# Altium PCB PCB2.PcbDoc
Units mil, origin at the board's own origin, x right, y up, seen from the top; angles counter-clockwise.
Board outline 2510 x 3100 mil, 2 copper layers (Top Layer, Bottom Layer); 20 components, 24 nets, 168 pads, 7 vias.
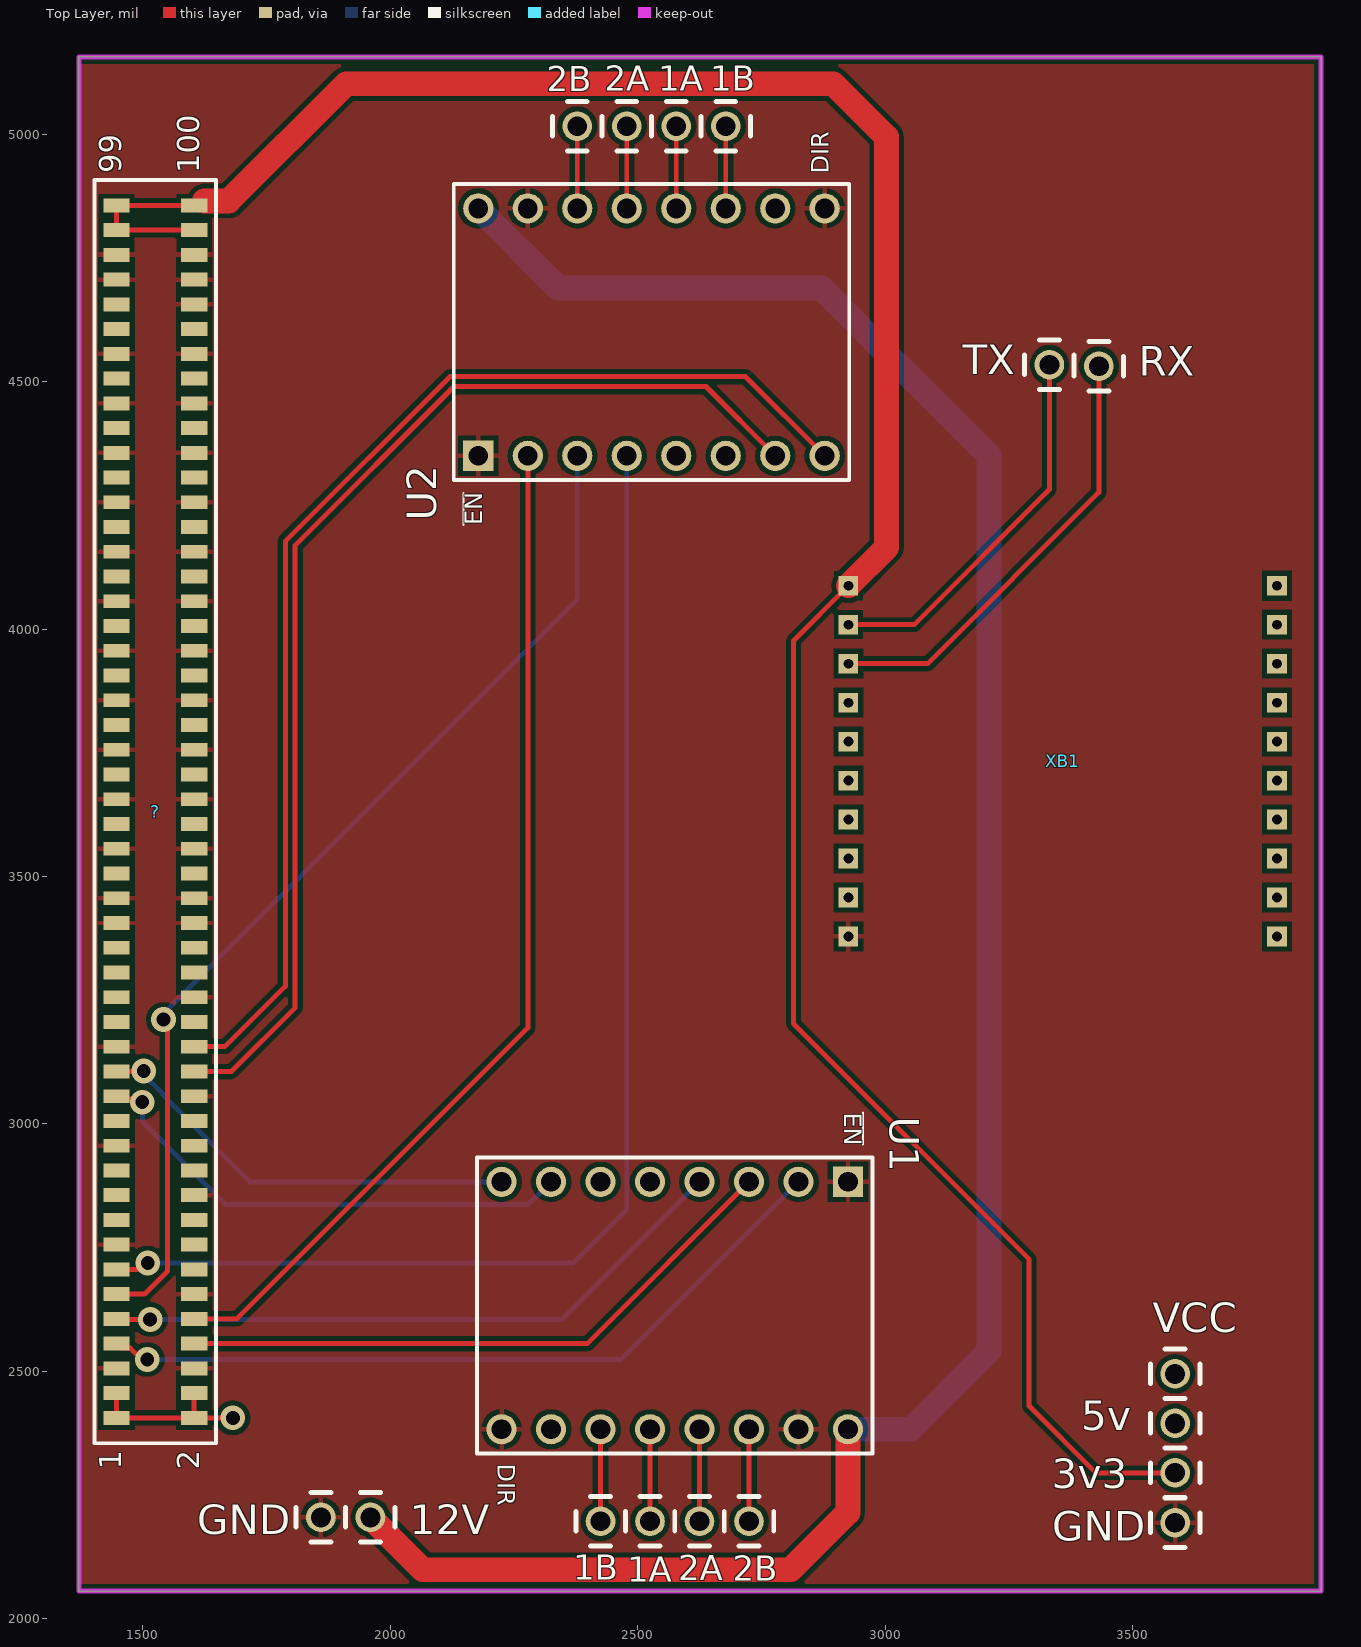
[diagram p0: Top Layer view]
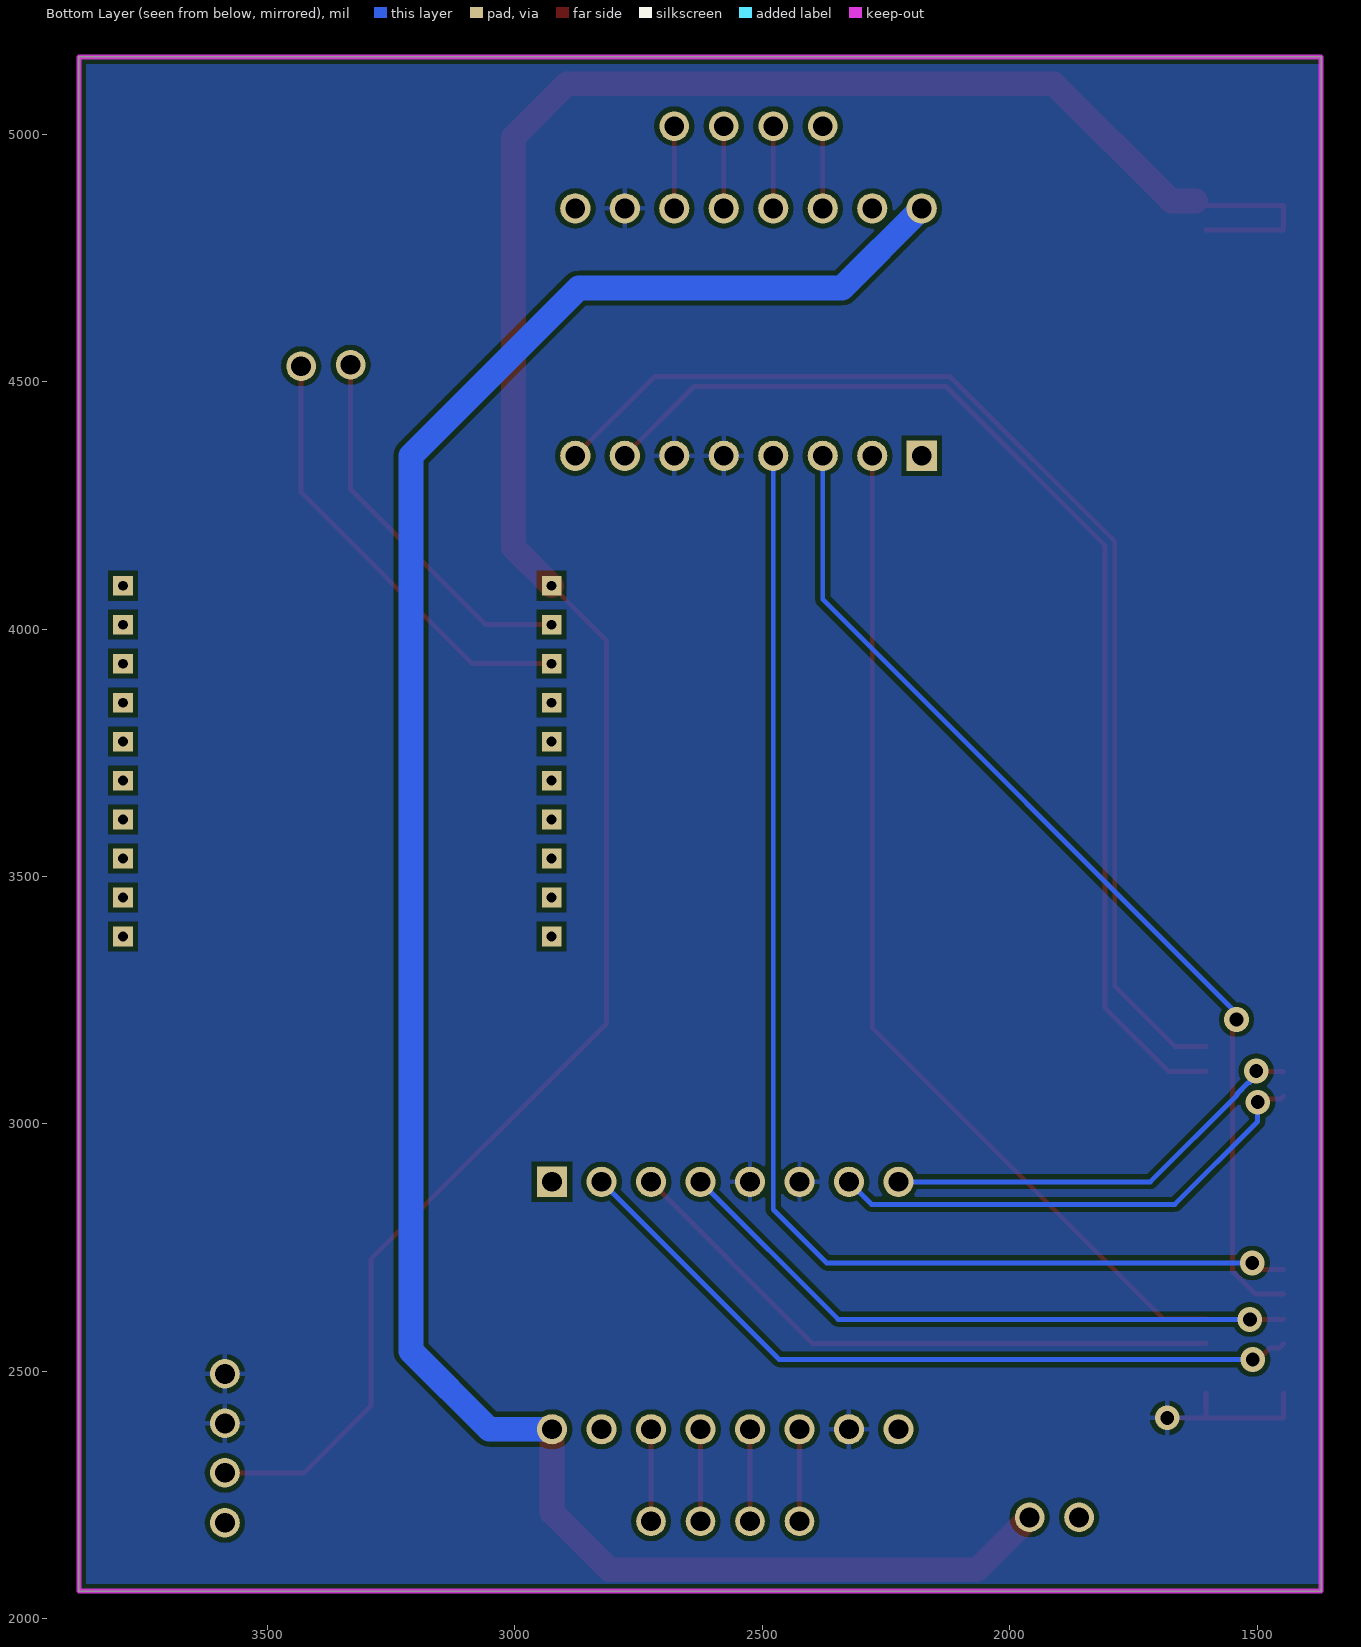
[diagram p1: Bottom Layer view, seen from below]

## Layer stack, top to bottom
Top Solder: solder mask 0.4, Solder Resist, Dk 3.5
Top Layer: signal copper 1.4
Dielectric 1: dielectric 12.6, FR-4, Dk 4.8
Bottom Layer: signal copper 1.4
Bottom Solder: solder mask 0.4, Solder Resist, Dk 3.5

## Board outline
1371,2056 1371,5156 3881,5156 3881,2056

## Design rules (kind name [scope] priority, off if disabled: settings)
Clearance [All] p1: gap=10 ignorepadtopadclearanceinfootprint=FALSE except(0: Arc-Hole Track-Hole SMDPad-Hole THPad-Hole Via-Hole Fill-Hole Poly-Hole Region-Hole Text-Hole)
ComponentClearance [All] p1 off: gap=10 collisioncheckmode=3 verticalgap=10 showdistances=FALSE
PolygonConnect [All] p1: connectstyle=Relief reliefconductorwidth=10 reliefentries=4 polygonreliefangle="90 Angle" airgapwidth=10
RoutingVias [All] p1: holewidth=28 width=50 viastyle="Through Hole" minholewidth=28 minwidth=50 maxholewidth=28 maxwidth=50
SolderMaskExpansion [All] p1: expansion=4
Width [All] p1: maxlimit=50 minlimit=10 preferedwidth=10 minimp=50.000000 maximp=50.000000 favimp=50.000000
29 further rules are at their usual default settings.

## Classes and differential pairs
component class Sheet2: 1A 1B 2A 2B 3v3 5v 12V ? GND RX TX U1 U2 VCC XB1

## Components (designator, comment, footprint, x,y, rotation, side; value= is the part's Value field where it differs from the comment)
1A "Pin 100mil" "Pin 100mil" 2578,5016 r90 top (schematic designator 1A_2)
1A "Pin 100mil" "Pin 100mil" 2525,2197 r180 top (schematic designator 1A_1)
1B "Pin 100mil" "Pin 100mil" 2678,5016 r90 top (schematic designator 1B_2)
1B "Pin 100mil" "Pin 100mil" 2425,2197 r180 top (schematic designator 1B_1)
2A "Pin 100mil" "Pin 100mil" 2478,5016 r90 top (schematic designator 2A_2)
2A "Pin 100mil" "Pin 100mil" 2625,2197 r270 top (schematic designator 2A_1)
2B "Pin 100mil" "Pin 100mil" 2378,5016 r90 top (schematic designator 2B_2)
2B "Pin 100mil" "Pin 100mil" 2725,2197 r270 top (schematic designator 2B_1)
3v3 "Pin 100mil" "Pin 100mil" 3586,2295 r90 top
5v "Pin 100mil" "Pin 100mil" 3586,2395 r90 top
12V "Pin 100mil" "Pin 100mil" 1960,2205 r0 top
? "SAMTEC-CLP-150-02-X-DHJ" SAMTEC-CLP-150-02-X-DH 1525.5,3631 r90 top
GND "Pin 100mil" "Pin 100mil" 3586,2194 r90 top
GND "Pin 100mil" "Pin 100mil" 1860,2205 r270 top
RX "Pin 100mil" "Pin 100mil" 3432,4531 r0 top
TX "Pin 100mil" "Pin 100mil" 3332,4534 r0 top
U1 "A4988 Motor Driver" "Polo-A4988 Motor Driver_V" 2575,2633 r270 top
U2 "A4988 Motor Driver" "Polo-A4988 Motor Driver_V" 2528,4600 r90 top
VCC "Pin 100mil" "Pin 100mil" 3586,2495 r0 top
XB1 "XB24CDMPIT-001" *DIP-20 2876.49,3063.46 r0 top

## Footprints (in the part's own frame and the unit in brackets; to place one, negate y for a bottom-side part, rotate by r counter-clockwise, add the part's x,y. Pads: shape width x height; smd on the part's side, far side on the other; paste and mask are expansions set on the pad)
*DIP-20 [mm]
  rect 1.008x1.008 hole 0.5: 1(1.254,26.009) 2(1.254,24.009) 3(1.254,22.009) 4(1.254,20.009) 5(1.254,18.009) 6(1.254,16.009) 7(1.254,14.009) 8(1.254,12.009) 9(1.254,10.009) 10(1.254,8.009) 11(23.254,8.009) 12(23.254,10.009) 13(23.254,12.009) 14(23.254,14.009) 15(23.254,16.009) 16(23.254,18.009) 17(23.254,20.009) 18(23.254,22.009) 19(23.254,24.009) 20(23.254,26.009)
  Top Layer region: 1.728,24.181 1.467,24.466 1.082,24.483 0.797,24.222 0.78,23.837 1.041,23.552 1.426,23.535 1.711,23.796
  Top Layer region: 1.728,22.181 1.467,22.466 1.082,22.483 0.797,22.222 0.78,21.837 1.041,21.552 1.426,21.535 1.711,21.796
  Top Layer region: 1.728,20.181 1.467,20.466 1.082,20.483 0.797,20.222 0.78,19.837 1.041,19.552 1.426,19.535 1.711,19.796
  Top Layer region: 1.728,18.181 1.467,18.466 1.082,18.483 0.797,18.222 0.78,17.837 1.041,17.552 1.426,17.535 1.711,17.796
  Top Layer region: 1.728,16.181 1.467,16.466 1.082,16.483 0.797,16.222 0.78,15.837 1.041,15.552 1.426,15.535 1.711,15.796
  Top Layer region: 1.728,14.181 1.467,14.466 1.082,14.483 0.797,14.222 0.78,13.837 1.041,13.552 1.426,13.535 1.711,13.796
  Top Layer region: 1.728,12.181 1.467,12.466 1.082,12.483 0.797,12.222 0.78,11.837 1.041,11.552 1.426,11.535 1.711,11.796
  Top Layer region: 1.728,10.181 1.467,10.466 1.082,10.483 0.797,10.222 0.78,9.837 1.041,9.552 1.426,9.535 1.711,9.796
  Top Layer region: 1.728,8.181 1.467,8.466 1.082,8.483 0.797,8.222 0.78,7.837 1.041,7.552 1.426,7.535 1.711,7.796
  Top Layer region: 23.728,26.181 23.467,26.466 23.082,26.483 22.797,26.222 22.78,25.837 23.041,25.552 23.426,25.535 23.711,25.796
  Top Layer region: 23.728,24.181 23.467,24.466 23.082,24.483 22.797,24.222 22.78,23.837 23.041,23.552 23.426,23.535 23.711,23.796
  Top Layer region: 23.728,22.181 23.467,22.466 23.082,22.483 22.797,22.222 22.78,21.837 23.041,21.552 23.426,21.535 23.711,21.796
  Top Layer region: 23.728,20.181 23.467,20.466 23.082,20.483 22.797,20.222 22.78,19.837 23.041,19.552 23.426,19.535 23.711,19.796
  Top Layer region: 23.728,18.181 23.467,18.466 23.082,18.483 22.797,18.222 22.78,17.837 23.041,17.552 23.426,17.535 23.711,17.796
  Top Layer region: 23.728,16.181 23.467,16.466 23.082,16.483 22.797,16.222 22.78,15.837 23.041,15.552 23.426,15.535 23.711,15.796
  Top Layer region: 23.728,14.181 23.467,14.466 23.082,14.483 22.797,14.222 22.78,13.837 23.041,13.552 23.426,13.535 23.711,13.796
  Top Layer region: 23.728,12.181 23.467,12.466 23.082,12.483 22.797,12.222 22.78,11.837 23.041,11.552 23.426,11.535 23.711,11.796
  Top Layer region: 23.728,10.181 23.467,10.466 23.082,10.483 22.797,10.222 22.78,9.837 23.041,9.552 23.426,9.535 23.711,9.796
  Top Layer region: 23.728,8.181 23.467,8.466 23.082,8.483 22.797,8.222 22.78,7.837 23.041,7.552 23.426,7.535 23.711,7.796
  Bottom Layer region: 1.728,24.181 1.467,24.466 1.082,24.483 0.797,24.222 0.78,23.837 1.041,23.552 1.426,23.535 1.711,23.796
  Bottom Layer region: 1.728,22.181 1.467,22.466 1.082,22.483 0.797,22.222 0.78,21.837 1.041,21.552 1.426,21.535 1.711,21.796
  Bottom Layer region: 1.728,20.181 1.467,20.466 1.082,20.483 0.797,20.222 0.78,19.837 1.041,19.552 1.426,19.535 1.711,19.796
  Bottom Layer region: 1.728,18.181 1.467,18.466 1.082,18.483 0.797,18.222 0.78,17.837 1.041,17.552 1.426,17.535 1.711,17.796
  Bottom Layer region: 1.728,16.181 1.467,16.466 1.082,16.483 0.797,16.222 0.78,15.837 1.041,15.552 1.426,15.535 1.711,15.796
  Bottom Layer region: 1.728,14.181 1.467,14.466 1.082,14.483 0.797,14.222 0.78,13.837 1.041,13.552 1.426,13.535 1.711,13.796
  Bottom Layer region: 1.728,12.181 1.467,12.466 1.082,12.483 0.797,12.222 0.78,11.837 1.041,11.552 1.426,11.535 1.711,11.796
  Bottom Layer region: 1.728,10.181 1.467,10.466 1.082,10.483 0.797,10.222 0.78,9.837 1.041,9.552 1.426,9.535 1.711,9.796
  Bottom Layer region: 1.728,8.181 1.467,8.466 1.082,8.483 0.797,8.222 0.78,7.837 1.041,7.552 1.426,7.535 1.711,7.796
  Bottom Layer region: 23.728,26.181 23.467,26.466 23.082,26.483 22.797,26.222 22.78,25.837 23.041,25.552 23.426,25.535 23.711,25.796
  Bottom Layer region: 23.728,24.181 23.467,24.466 23.082,24.483 22.797,24.222 22.78,23.837 23.041,23.552 23.426,23.535 23.711,23.796
  Bottom Layer region: 23.728,22.181 23.467,22.466 23.082,22.483 22.797,22.222 22.78,21.837 23.041,21.552 23.426,21.535 23.711,21.796
  Bottom Layer region: 23.728,20.181 23.467,20.466 23.082,20.483 22.797,20.222 22.78,19.837 23.041,19.552 23.426,19.535 23.711,19.796
  Bottom Layer region: 23.728,18.181 23.467,18.466 23.082,18.483 22.797,18.222 22.78,17.837 23.041,17.552 23.426,17.535 23.711,17.796
  Bottom Layer region: 23.728,16.181 23.467,16.466 23.082,16.483 22.797,16.222 22.78,15.837 23.041,15.552 23.426,15.535 23.711,15.796
  Bottom Layer region: 23.728,14.181 23.467,14.466 23.082,14.483 22.797,14.222 22.78,13.837 23.041,13.552 23.426,13.535 23.711,13.796
  Bottom Layer region: 23.728,12.181 23.467,12.466 23.082,12.483 22.797,12.222 22.78,11.837 23.041,11.552 23.426,11.535 23.711,11.796
  Bottom Layer region: 23.728,10.181 23.467,10.466 23.082,10.483 22.797,10.222 22.78,9.837 23.041,9.552 23.426,9.535 23.711,9.796
  Bottom Layer region: 23.728,8.181 23.467,8.466 23.082,8.483 22.797,8.222 22.78,7.837 23.041,7.552 23.426,7.535 23.711,7.796
  Multi-Layer region: 1.728,24.181 1.467,24.466 1.082,24.483 0.797,24.222 0.78,23.837 1.041,23.552 1.426,23.535 1.711,23.796
  Multi-Layer region: 1.728,22.181 1.467,22.466 1.082,22.483 0.797,22.222 0.78,21.837 1.041,21.552 1.426,21.535 1.711,21.796
  Multi-Layer region: 1.728,20.181 1.467,20.466 1.082,20.483 0.797,20.222 0.78,19.837 1.041,19.552 1.426,19.535 1.711,19.796
  Multi-Layer region: 1.728,18.181 1.467,18.466 1.082,18.483 0.797,18.222 0.78,17.837 1.041,17.552 1.426,17.535 1.711,17.796
  Multi-Layer region: 1.728,16.181 1.467,16.466 1.082,16.483 0.797,16.222 0.78,15.837 1.041,15.552 1.426,15.535 1.711,15.796
  Multi-Layer region: 1.728,14.181 1.467,14.466 1.082,14.483 0.797,14.222 0.78,13.837 1.041,13.552 1.426,13.535 1.711,13.796
  Multi-Layer region: 1.728,12.181 1.467,12.466 1.082,12.483 0.797,12.222 0.78,11.837 1.041,11.552 1.426,11.535 1.711,11.796
  Multi-Layer region: 1.728,10.181 1.467,10.466 1.082,10.483 0.797,10.222 0.78,9.837 1.041,9.552 1.426,9.535 1.711,9.796
  Multi-Layer region: 1.728,8.181 1.467,8.466 1.082,8.483 0.797,8.222 0.78,7.837 1.041,7.552 1.426,7.535 1.711,7.796
  Multi-Layer region: 23.728,26.181 23.467,26.466 23.082,26.483 22.797,26.222 22.78,25.837 23.041,25.552 23.426,25.535 23.711,25.796
  Multi-Layer region: 23.728,24.181 23.467,24.466 23.082,24.483 22.797,24.222 22.78,23.837 23.041,23.552 23.426,23.535 23.711,23.796
  Multi-Layer region: 23.728,22.181 23.467,22.466 23.082,22.483 22.797,22.222 22.78,21.837 23.041,21.552 23.426,21.535 23.711,21.796
  Multi-Layer region: 23.728,20.181 23.467,20.466 23.082,20.483 22.797,20.222 22.78,19.837 23.041,19.552 23.426,19.535 23.711,19.796
  Multi-Layer region: 23.728,18.181 23.467,18.466 23.082,18.483 22.797,18.222 22.78,17.837 23.041,17.552 23.426,17.535 23.711,17.796
  Multi-Layer region: 23.728,16.181 23.467,16.466 23.082,16.483 22.797,16.222 22.78,15.837 23.041,15.552 23.426,15.535 23.711,15.796
  Multi-Layer region: 23.728,14.181 23.467,14.466 23.082,14.483 22.797,14.222 22.78,13.837 23.041,13.552 23.426,13.535 23.711,13.796
  Multi-Layer region: 23.728,12.181 23.467,12.466 23.082,12.483 22.797,12.222 22.78,11.837 23.041,11.552 23.426,11.535 23.711,11.796
  Multi-Layer region: 23.728,10.181 23.467,10.466 23.082,10.483 22.797,10.222 22.78,9.837 23.041,9.552 23.426,9.535 23.711,9.796
  Multi-Layer region: 23.728,8.181 23.467,8.466 23.082,8.483 22.797,8.222 22.78,7.837 23.041,7.552 23.426,7.535 23.711,7.796
"Pin 100mil" [mil]
  round 60 hole 40.16: 0(0,0)
  silkscreen extent -50,-50 50,50
"Polo-A4988 Motor Driver_V" [mm] "THD, 16-Leads, Body 20.3x15.2mm, Pitch 2.54mm"
  rect 1.55x1.55 hole 1.02: 1(-6.35,8.89)
  round 1.55 hole 1.02: 2(-6.35,6.35) 3(-6.35,3.81) 4(-6.35,1.27) 5(-6.35,-1.27) 6(-6.35,-3.81) 7(-6.35,-6.35) 8(-6.35,-8.89) 9(6.35,-8.89) 10(6.35,-6.35) 11(6.35,-3.81) 12(6.35,-1.27) 13(6.35,1.27) 14(6.35,3.81) 15(6.35,6.35) 16(6.35,8.89)
  silkscreen extent -9.91,-10.15 7.6,10.15, body extent -7.6,-10.15 7.6,10.15, height 5.87
SAMTEC-CLP-150-02-X-DH [mil]
  rect 27.99x53.15 smd: 1(-1225,78.5) 2(-1225,-78.5) 3(-1175,78.5) 4(-1175,-78.5) 5(-1125,78.5) 6(-1125,-78.5) 7(-1075,78.5) 8(-1075,-78.5) 9(-1025,78.5) 10(-1025,-78.5) 11(-975,78.5) 12(-975,-78.5) 13(-925,78.5) 14(-925,-78.5) 15(-875,78.5) 16(-875,-78.5) 17(-825,78.5) 18(-825,-78.5) 19(-775,78.5) 20(-775,-78.5) 21(-725,78.5) 22(-725,-78.5) 23(-675,78.5) 24(-675,-78.5) 25(-625,78.5) 26(-625,-78.5) 27(-575,78.5) 28(-575,-78.5) 29(-525,78.5) 30(-525,-78.5) 31(-475,78.5) 32(-475,-78.5) 33(-425,78.5) 34(-425,-78.5) 35(-375,78.5) 36(-375,-78.5) 37(-325,78.5) 38(-325,-78.5) 39(-275,78.5) 40(-275,-78.5) 41(-225,78.5) 42(-225,-78.5) 43(-175,78.5) 44(-175,-78.5) 45(-125,78.5) 46(-125,-78.5) 47(-75,78.5) 48(-75,-78.5) 49(-25,78.5) 50(-25,-78.5) 51(25,78.5) 52(25,-78.5) 53(75,78.5) 54(75,-78.5) 55(125,78.5) 56(125,-78.5) 57(175,78.5) 58(175,-78.5) 59(225,78.5) 60(225,-78.5) 61(275,78.5) 62(275,-78.5) 63(325,78.5) 64(325,-78.5) 65(375,78.5) 66(375,-78.5) 67(425,78.5) 68(425,-78.5) 69(475,78.5) 70(475,-78.5) 71(525,78.5) 72(525,-78.5) 73(575,78.5) 74(575,-78.5) 75(625,78.5) 76(625,-78.5) 77(675,78.5) 78(675,-78.5) 79(725,78.5) 80(725,-78.5) 81(775,78.5) 82(775,-78.5) 83(825,78.5) 84(825,-78.5) 85(875,78.5) 86(875,-78.5) 87(925,78.5) 88(925,-78.5) 89(975,78.5) 90(975,-78.5) 91(1025,78.5) 92(1025,-78.5) 93(1075,78.5) 94(1075,-78.5) 95(1125,78.5) 96(1125,-78.5) 97(1175,78.5) 98(1175,-78.5) 99(1225,78.5) 100(1225,-78.5)
  silkscreen extent -1276,-123 1276,123

## Part data
1A 1A 1B 1B 2A 2A 2B 2B 3v3 5v 12V GND GND RX TX VCC: library part 1-Pin
U1 U2: library part CMP-1766-00001-1, "Stepper Motor Driver Carrier, 3 to 5.5 V, 2 A, 16-Pin THD", Case\Package=SOT-23-5, Frequency="3 MHz", Max Input Voltage="5.5 V", Max Operating Temperature="125 degC", Max Ouput Current="1 A", Min Input Voltage="3 V", Min Operating Temperature="-40 degC", Output Voltage="4.5 V", Package Quantity=250, ComponentLink1Description=Datasheet, ComponentLink1URL=https://www.pololu.com/file/0J1082/a4988-stepper-motor-driver-carrier-dimension-diagram.pdf, DatasheetVersion=Dec-15, Mount="Surface Mount", Output Current="1 A", Outputs=1, PackageDescription="16-Pin Through Hole Device, Body 20.3 x 15.2 mm, Pitch 2.54 mm", PackageReference="A4988 Motor Driver", Packaging="Tape and Reel", Pins=5, REACH SVHC="No SVHC", RoHSCompliant=true, Switching Frequency="3 MHz"
XB1: "XBee S2C DigiMesh, 2.4GHz, TH _PCB Ant_", Package="Module Digi International", Availability=Unavailable, MF="Digi International", MP=XB24CDMPIT-001, Price=None, SnapEDA_Link=https://www.snapeda.com/parts/XB24CDMPIT-001/Digi%20International/view-part/?ref=snap

## Via types
v1: diameter 50, hole 28, Top Layer to Bottom Layer, 7 vias

## Nets (pads, with @x,y where several pads share a name; then routed paths per layer and width w, separated by ;. In a path a pad name is that pad's centre, name@x,y a point inside that pad or via, vN(x,y) a via of type N, cw(c..) or ccw(c..) an arc to the next point about the centre after c; other vN are vias at no path point)
3v3: 3v3.0 ?.97 ?.98 ?.99 ?.100 XB1.1 | length 5099.6
  Top Layer w10: ?.98 ?.97 ?.99 ?.100 1615.9,4856 ?.100@1624.89,4864.99 ; XB1.1 2815,3976.58 2815,3202.36 3291,2726.36 3291,2430 3426,2295 3v3.0
  Top Layer w50: ?.100@1624.89,4864.99 1673.99,4864.99 1911,5102 2895,5102 3003,4994 3003,4164.58 XB1.1
+5: 5v.0 ?.1 ?.2 ?.3 ?.4 U1.5 U1.6 U1.10 U2.5 U2.6 U2.10 VCC.0 | length 335
  Top Layer w10: ?.3 ?.1 ?.2 ; ?.4 ?.2 ; v1(1682,2406) ?.2
+12: 12V.0 U1.16 U2.16 | length 4623.5
  Top Layer w50: 12V.0 2066,2099 2809,2099 2925,2215 U1.16
  Bottom Layer w50: U2.16 2339,4689 2871,4689 3210,4350 3210,2541 3052,2383 U1.16
DIR_1: ?.29 U1.8 | length 898.1
  Top Layer w10: ?.29 1488.58,3106 1502,3092.57 v1(1502,3107)
  Bottom Layer w10: v1(1502,3107) 1502,3097 1515,3084 1517.57,3084 1541,3060.57 1541,3058 1716,2883 U1.8
DIR_2: ?.32 U2.8 | length 2427.9
  Top Layer w10: ?.32 1666,3156 1788,3278 1788,4177.28 2120.72,4510 2718,4510 U2.8
GND: ?.5 ?.6 ?.12 ?.15 ?.20 ?.23 ?.28 ?.31 ?.36 ?.41 ?.42 ?.43 ?.44 ?.47 ?.48 ?.51 ?.52 ?.55 ?.56 ?.59 ?.60 ?.63 ?.64 ?.67 ?.68 ?.71 ?.72 ?.75 ?.76 ?.79 ?.80 ?.83 ?.84 ?.87 ?.88 ?.92 ?.93 ?.94 ?.95 ?.96 GND.0 U1.1 U1.9 U1.15 U2.1 U2.9 U2.15 XB1.10 | length 15.4
  Top Layer w10: U1.1 U1.1@2935.86,2893.86
MS1_1: ?.7 U1.2 | length 1540
  Top Layer w10: ?.7 1455.99,2547.01 1474.99,2547.01 1498,2524 v1(1509,2524)
  Bottom Layer w10: v1(1509,2524) 2466,2524 U1.2
MS1_2: ?.10 U2.2 | length 2073.6
  Top Layer w10: ?.10 1690,2606 2278,3194 U2.2
MS2_1: ?.8 U1.3 | length 1256.4
  Top Layer w10: ?.8 2398,2556 U1.3
MS2_2: ?.11 U2.3 | length 2121.2
  Top Layer w10: ?.11 1503.57,2656 1550,2702.43 1550,3206 1545,3211 v1(1542,3211)
  Bottom Layer w10: v1(1542,3211) 1542,3224 1555,3237 2378,4060 U2.3
MS3_1: ?.9 U1.4 | length 1293.6
  Top Layer w10: ?.9 1448,2605 v1(1515,2605)
  Bottom Layer w10: v1(1515,2605) 2347,2605 U1.4
MS3_2: ?.13 U2.4 | length 2604.1
  Top Layer w10: ?.13 1488.58,2706 1501.58,2719 v1(1510,2719)
  Bottom Layer w10: v1(1510,2719) 2370,2719 2478,2827 U2.4
Net1A_1_0: 1A.0@2525,2197 U1.12 | length 186
  Top Layer w10: 1A.0@2525,2197 U1.12
Net1A_2_0: 1A.0@2578,5016 U2.12 | length 166
  Top Layer w10: U2.12 1A.0@2578,5016
Net1B_1_0: 1B.0@2425,2197 U1.11 | length 186
  Top Layer w10: 1B.0@2425,2197 U1.11
Net1B_2_0: 1B.0@2678,5016 U2.11 | length 166
  Top Layer w10: U2.11 1B.0@2678,5016
Net2A_1_0: 2A.0@2625,2197 U1.13 | length 186
  Top Layer w10: 2A.0@2625,2197 U1.13
Net2A_2_0: 2A.0@2478,5016 U2.13 | length 166
  Top Layer w10: U2.13 2A.0@2478,5016
Net2B_1_0: 2B.0@2725,2197 U1.14 | length 186
  Top Layer w10: 2B.0@2725,2197 U1.14
Net2B_2_0: 2B.0@2378,5016 U2.14 | length 166
  Top Layer w10: U2.14 2B.0@2378,5016
STEP_1: ?.27 U1.7 | length 1010.2
  Top Layer w10: ?.27 1453,3050 1493.07,3050 v1(1499.07,3044)
  Bottom Layer w10: v1(1499.07,3044) 1499.07,3004.93 1666.51,2837.49 2279.49,2837.49 U1.7
STEP_2: ?.30 U2.7 | length 2352.4
  Top Layer w10: ?.30 1679,3106 1808,3235 1808,4169 2129,4490 2638,4490 U2.7
UART_RX: RX.0 XB1.3 | length 904.5
  Top Layer w10: XB1.3 3085.96,3929.96 3432,4276 RX.0
UART_TX: TX.0 XB1.2 | length 771.3
  Top Layer w10: XB1.2 3058.7,4008.7 3332,4282 TX.0
pads on no net: ?.14 ?.16 ?.17 ?.18 ?.19 ?.21 ?.22 ?.24 ?.25 ?.26 ?.33 ?.34 ?.35 ?.37 ?.38 ?.39 ?.40 ?.45 ?.46 ?.49 ?.50 ?.53 ?.54 ?.57 ?.58 ?.61 ?.62 ?.65 ?.66 ?.69 ?.70 ?.73 ?.74 ?.77 ?.78 ?.81 ?.82 ?.85 ?.86 ?.89 ?.90 ?.91 XB1.4 XB1.5 XB1.6 XB1.7 XB1.8 XB1.9 XB1.11 XB1.12 XB1.13 XB1.14 XB1.15 XB1.16 XB1.17 XB1.18 XB1.19 XB1.20

## Polygon pours and split planes (outlines as drawn)
GND on Top Layer "Top Layer-GND" (solid, pour order 0): 1371,2056 1371,5156 3881,5156 3881,2056
+5 on Bottom Layer "+5_L02_P001" (solid, pour order 1): 1371,2056 1371,5156 3881,5156 3881,2056

## Keep-outs
Keep-Out Layer:
  the board outline again, w10

## Dimensions
3881,2056 to 1363,2064 on Top Overlay
1363,2064 to 1371,5156 on Top Overlay

## Text inside footprints (layer, text, board x,y; h text height)
?: Top Overlay "2" at 1629,2300.84 h77.5 r90; Top Overlay "1" at 1472,2300.84 h77.5 r90; Top Overlay "100" at 1629,4920.65 h77.5 r90; Top Overlay "99" at 1472,4920.65 h77.5 r90; Mechanical 40 "3.988" at 1530.5,2175.02 h15.5 r90; Mechanical 40 "3.048" at 1530.5,2100.02 h15.5 r90; Mechanical 40 "1.270" at 1695.5,2302.5 h15.5 r90; Mechanical 40 "62.230" at 1735.5,3599.5 h15.5 r90; Mechanical 40 "63.881" at 1215.5,3599.5 h15.5 r90; Mechanical 16 "2" at 1629,2300.84 h77.5 r90; Mechanical 16 "1" at 1472,2300.84 h77.5 r90; Mechanical 16 "100" at 1629,4920.65 h77.5 r90; Mechanical 16 "99" at 1472,4920.65 h77.5 r90
U1: Top Overlay "DIR" at 2205,2313 h60 r270; Top Overlay "EN" at 2905,3023 h60 r270
U2: Top Overlay "DIR" at 2898,4920 h60 r90; Top Overlay "EN" at 2198,4210 h60 r90
XB1: Mechanical 4 "XBee" at 3112.98,3731.57 h73.82; Mechanical 4 "XBee" at 3112.98,3731.57 h73.82